# Altium PCB YW_001.PcbDoc
Units mm, origin at the board's own origin, x right, y up, seen from the top; angles counter-clockwise.
Board outline 72.75 x 132.75 mm, 2 copper layers (Top Layer, Bottom Layer); 86 components, 84 nets, 274 pads, 37 vias.
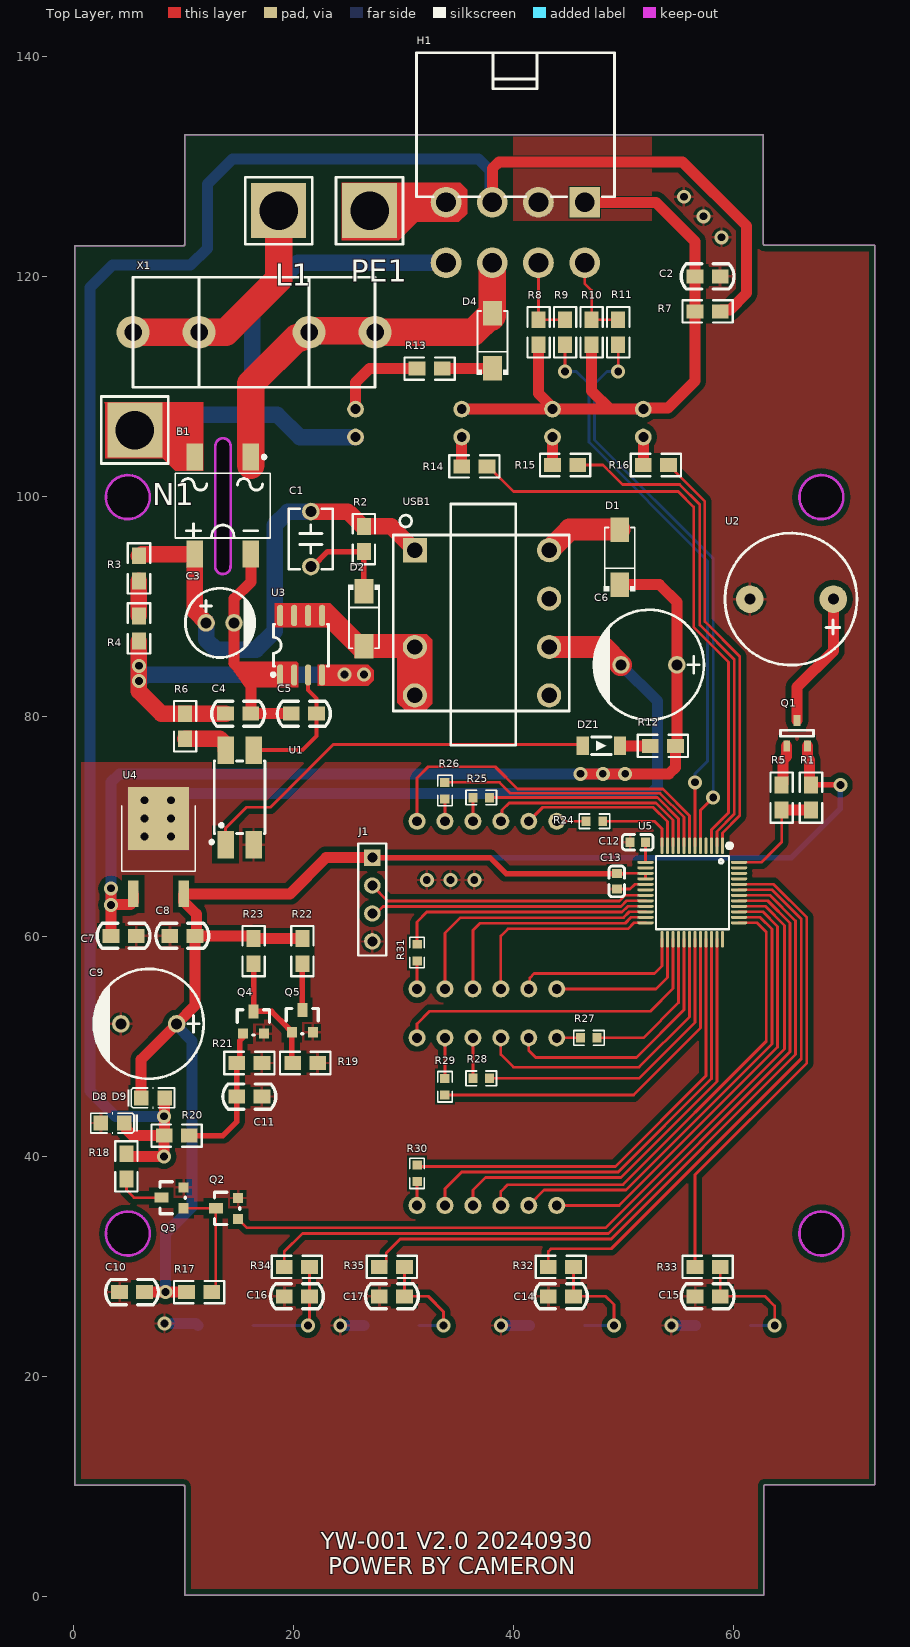
[diagram p0: Top Layer view]
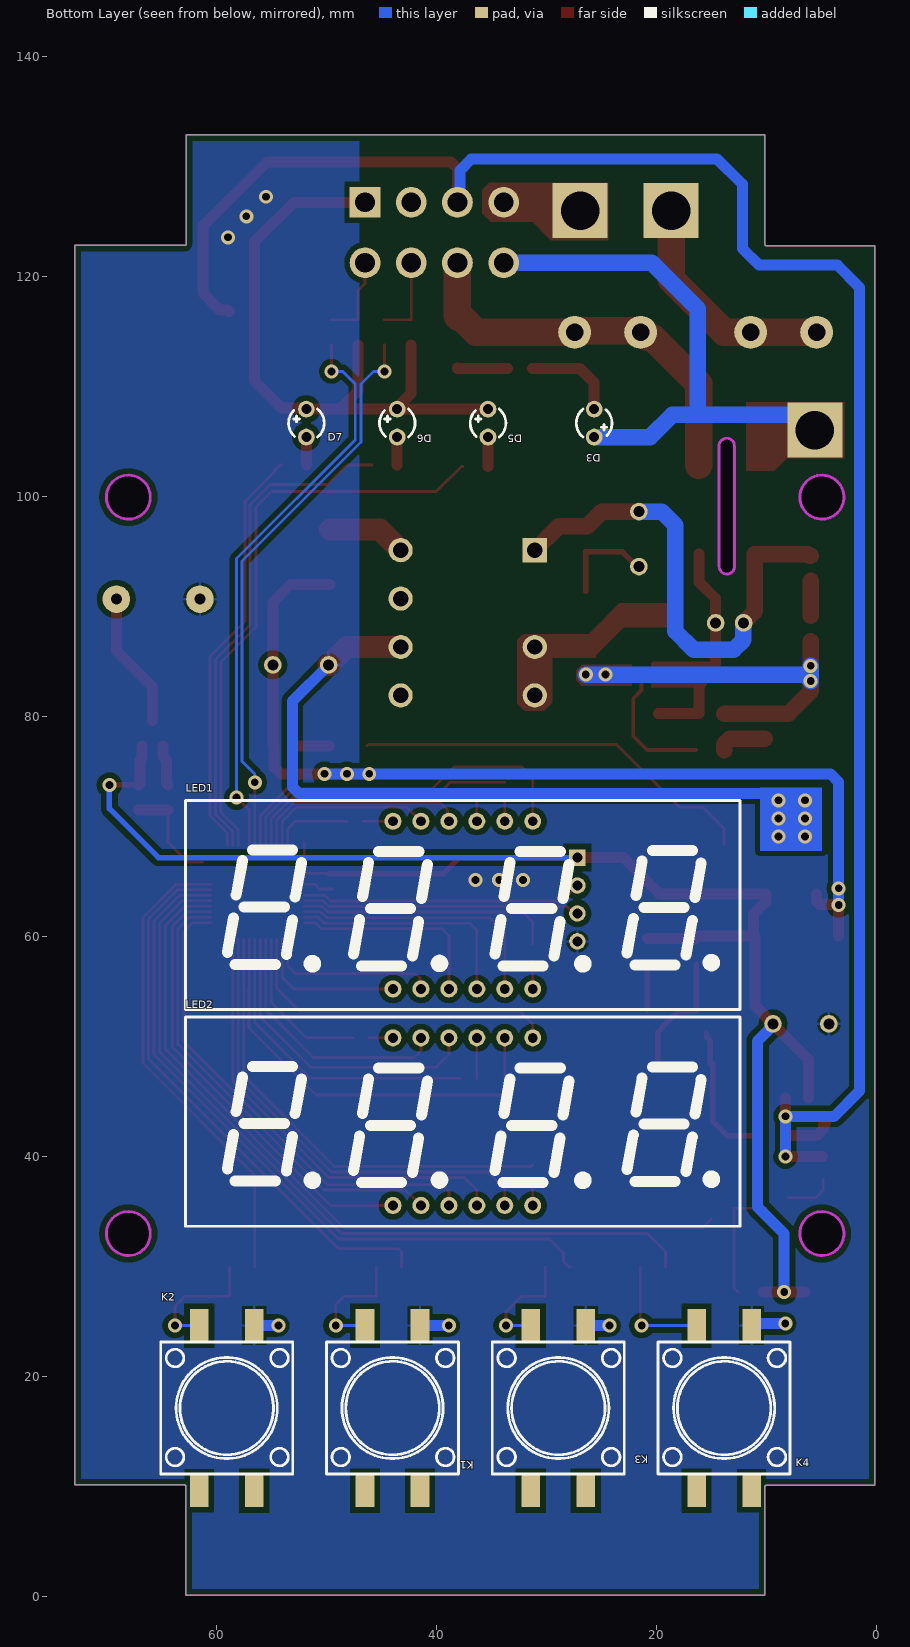
[diagram p1: Bottom Layer view, seen from below]

## Layer stack, top to bottom
Top Solder: solder mask 0.0102, Solder Resist, Dk 3.5
Top Layer: signal copper 0.0356
Dielectric 1: dielectric 0.32, FR-4, Dk 4.8
Bottom Layer: signal copper 0.0356
Bottom Solder: solder mask 0.0102, Solder Resist, Dk 3.5

## Board outline
0.127,10.127 10,10.127 cw(c10,10) 10.127,10 10.127,0.127 62.771,0.127 62.771,10.036 cw(c62.898,10.036) 62.898,10.163 72.873,10.163 72.873,122.843 cw(c72.862,122.969) 72.862,122.842 62.862,122.842 cw(c62.862,122.969) 62.735,122.969 62.735,132.873 10.127,132.873 10.127,122.933 cw(c10,122.933) 10,122.806 0.127,122.806
cut-out: 12.896,93.653 ccw(c13.596,93.653) 14.296,93.669 14.303,93.668 14.303,104.627 14.305,104.6 ccw(c13.605,104.6) 12.905,104.584 12.9,104.596
cut-out: 65.995,99.949 ccw(c67.995,99.949) 67.995,97.949 ccw(c67.995,99.949) 69.995,99.949 ccw(c67.995,99.949) 67.995,101.949 ccw(c67.995,99.949)
cut-out: 4.953,97.949 cw(c4.953,99.949) 2.953,99.949 cw(c4.953,99.949) 4.953,101.949 cw(c4.953,99.949) 6.953,99.949 cw(c4.953,99.949)
cut-out: 2.953,33.007 ccw(c4.953,33.007) 4.953,31.007 ccw(c4.953,33.007) 6.953,33.007 ccw(c4.953,33.007) 4.953,35.007 ccw(c4.953,33.007)
cut-out: 65.995,33.007 ccw(c67.995,33.007) 67.995,31.007 ccw(c67.995,33.007) 69.995,33.007 ccw(c67.995,33.007) 67.995,35.007 ccw(c67.995,33.007)

## Design rules (kind name [scope] priority, off if disabled: settings)
Clearance Clearance_1 [InPolygon] p1: gap=0.5 ignorepadtopadclearanceinfootprint=TRUE
Clearance [All] p2: gap=0.1 ignorepadtopadclearanceinfootprint=TRUE except(0: Arc-Hole Track-Hole SMDPad-Hole THPad-Hole Via-Hole Fill-Hole Poly-Hole Region-Hole Text-Hole)
DiffPairsRouting DiffPair_DiffPairsRouting [InDifferentialPair ('NewDifferentialPair1')] p1: maxlimit=0.254 minlimit=0.1 mostfreqgap=0.254 toplayer_minwidth=0.1 toplayer_maxwidth=0.381 toplayer_prefwidth=0.381 bottomlayer_minwidth=0.1 bottomlayer_maxwidth=0.381 bottomlayer_prefwidth=0.381 maxuncoupledlength=12.7
DiffPairsRouting DiffPair_DiffPairsRouting_1 [InDifferentialPair ('NewDifferentialPair1')] p2: maxlimit=0.254 minlimit=0.254 mostfreqgap=0.254 toplayer_minwidth=0.381 toplayer_maxwidth=0.381 toplayer_prefwidth=0.381 bottomlayer_minwidth=0.381 bottomlayer_maxwidth=0.381 bottomlayer_prefwidth=0.381 maxuncoupledlength=12.7
DiffPairsRouting [All] p3: maxlimit=0.254 minlimit=0.254 mostfreqgap=0.254 toplayer_minwidth=0.381 toplayer_maxwidth=0.381 toplayer_prefwidth=0.381 bottomlayer_minwidth=0.381 bottomlayer_maxwidth=0.381 bottomlayer_prefwidth=0.381 maxuncoupledlength=12.7
MatchedLengths DiffPair_MatchedLengths [InDifferentialPair ('NewDifferentialPair1')] p1: tolerance=25.4 checknetsindiffpair=FALSE checkdiffpairvsdiffpair=TRUE checkxsignals=TRUE checkothers=TRUE
MatchedLengths DiffPair_MatchedLengths_1 [InDifferentialPair ('NewDifferentialPair1')] p2: tolerance=25.4 checknetsindiffpair=FALSE checkdiffpairvsdiffpair=TRUE checkxsignals=TRUE checkothers=TRUE
PolygonConnect [All] p1: connectstyle=Relief reliefconductorwidth=0.254 reliefentries=4 polygonreliefangle="90 Angle" airgapwidth=0.254
RoutingVias [All] p1: holewidth=0.711 width=1.27 viastyle="Through Hole" minholewidth=0.711 minwidth=1.27 maxholewidth=0.711 maxwidth=1.27
SolderMaskExpansion [All] p1: expansion=0.102 istentingtop=FALSE
Width [All] p1: maxlimit=4 minlimit=0.254 preferedwidth=0.254 minimp=50.000000 maximp=50.000000 favimp=50.000000
29 further rules are at their usual default settings.

## Components (designator, comment, footprint, x,y, rotation, side; value= is the part's Value field where it differs from the comment)
B1 "DB107S" DB107S 13.589,99.187 r180 top
C1 "1uF" CAP-TH_L5.5-W4.0-P5.00-D0.5 21.59,96.139 r270 top
C2 "1uF" 0805C 58.805,120.015 r180 top
C3 "4.7uF450V" CAP-TH_BD6.3-P2.50-D1.0-FD 13.335,88.519 r0 top
C4 "1uF" 0805C 13.839,80.264 r0 top
C5 "1uF" 0805C 22.102,80.264 r180 top
C6 "1000uF25V" CAP-TH_BD10.0-P5.00-D1.0-FD 52.324,84.709 r180 top
C7 "1uF" 0805C 5.719,60.071 r180 top
C8 "1uF" 0805C 11.053,60.071 r180 top
C9 "1000uF25V" CAP-TH_BD10.0-P5.00-D1.0-FD 6.858,52.07 r180 top
C10 "100nF" 0805C 6.481,27.686 r180 top
C11 "100nF" 0805C 14.855,45.466 r0 top
C12 "100nF" C0603 51.308,68.58 r0 top value=0.1uF
C13 "100nF" C0603 49.403,65.024 r90 top value=0.1uF
C14 "104P" 0805C 45.47,27.305 r180 top value=0.1uF
C15 "104P" 0805C 58.805,27.305 r180 top value=0.1uF
C16 "104P" 0805C 21.467,27.305 r180 top value=0.1uF
C17 "104P" 0805C 30.103,27.305 r180 top value=0.1uF
D1 "RS2M" SMA-SMD_L4.4-W2.7-LS5.4-RD 49.657,94.488 r90 top
D2 "RS2M" SMA-SMD_L4.4-W2.7-LS5.4-RD 26.416,88.9 r270 top
D3 "HLMP-1503-D0000" LED-TH_BD3.0-P2.54-RD 25.654,106.68 r270 bottom
D4 "RS2M" SMA-SMD_L4.4-W2.7-LS5.4-RD 38.1,114.173 r90 top
D5 "HLMP-1503-D0000" LED-TH_BD3.0-P2.54-RD 35.306,106.68 r90 bottom
D6 "HLMP-1503-D0000" LED-TH_BD3.0-P2.54-RD 43.561,106.68 r90 bottom
D7 "HLMP-1503-D0000" LED-TH_BD3.0-P2.54-RD 51.816,106.68 r90 bottom
D8 "CD4148WSP" D0805-RD 3.556,43.053 r180 top
D9 "CD4148WSP" D0805-RD 7.239,45.339 r0 top
DZ1 "ZMM24" LL-34_L3.5-W1.5-RD 48.006,77.343 r180 top
H1 "HC-5557-2*4AW" CONN-TH_8P-P4.20_5557-2X4AW 40.182,123.996 r180 top
J1 "CON4" HDR1X4 27.178,67.183 r270 top
K1 "TS1212TPFS 250gf 072" KEY-SMD_4P-L12.0-W12.0-P5.00-LS15.0 43.984,17.145 r90 bottom
K2 "TS1212TPFS 250gf 072" KEY-SMD_4P-L12.0-W12.0-P5.00-LS15.0 59.055,17.145 r90 bottom
K3 "TS1212TPFS 250gf 072" KEY-SMD_4P-L12.0-W12.0-P5.00-LS15.0 13.843,17.145 r90 bottom
K4 "TS1212TPFS 250gf 072" KEY-SMD_4P-L12.0-W12.0-P5.00-LS15.0 28.914,17.145 r90 bottom
L1 "PZ254V-11-01P" HDR-TH_1P-P5 19.05,123.952 r0 top
LED1 "FJ5461BH 橙红" LED-SEG-TH_FJ5461AH 37.592,62.865 r180 bottom locked
LED2 "FJ5461BH 橙红" LED-SEG-TH_FJ5461AH 37.592,43.18 r180 bottom locked
N1 "PZ254V-11-01P" HDR-TH_1P-P5 5.969,104.013 r0 top
PE1 "PZ254V-11-01P" HDR-TH_1P-P5 27.305,123.952 r0 top
Q1 "8550" SOT-23 65.786,78.486 r0 top
Q2 "SW8050" "SOT-23 - S8550" 14.986,34.341 r90 top
Q3 "SW8050" "SOT-23 - S8550" 10.033,35.306 r90 top
Q4 "SW8050" "SOT-23 - S8550" 15.418,51.181 r0 top
Q5 "SW8050" "SOT-23 - S8550" 19.863,51.308 r0 top
R1 "10k" 0805 67.056,73.787 r270 top
R2 "100k" 0805 26.416,97.282 r270 top value=100K
R3 "1M" 0805 5.969,92.329 r90 top
R4 "1M" 0805 5.969,86.868 r90 top
R5 "10k" 0805 64.389,73.787 r270 top
R6 "4.7k" 0805 10.16,77.978 r90 top
R7 "10k" 0805 58.801,116.84 r180 top
R8 "47k" 0805 42.291,116.078 r270 top
R9 "100" 0805 44.704,113.792 r90 top
R10 "47k" 0805 47.117,116.078 r270 top
R11 "100" 0805 49.53,113.792 r90 top
R12 "10k" 0805 54.737,77.343 r180 top
R13 "240k" 0805 33.528,111.633 r180 top
R14 "47k" 0805 35.306,102.743 r0 top
R15 "47k" 0805 43.561,102.87 r0 top
R16 "47k" 0805 51.816,102.87 r0 top
R17 "2.2k" 0805 12.573,27.686 r180 top
R18 "470" 0805 4.826,37.973 r90 top
R19 "10k" 0805 22.225,48.514 r180 top
R20 "20k" 0805 10.541,41.91 r180 top
R21 "10k" 0805 17.145,48.514 r180 top
R22 "4.7k" 0805 20.828,57.531 r90 top
R23 "4.7k" 0805 16.383,57.531 r90 top
R24 "10R" R0603 47.371,70.485 r180 top
R25 "10R" R0603 37.084,72.644 r180 top
R26 "10R" R0603 33.782,73.27 r270 top
R27 "10R" R0603 46.863,50.8 r180 top
R28 "10R" R0603 37.084,47.117 r180 top
R29 "10R" R0603 33.782,46.355 r90 top
R30 "10R" R0603 31.242,38.481 r90 top
R31 "10R" R0603 31.242,58.547 r90 top
R32 "2.2k" 0805 45.466,29.972 r180 top
R33 "2.2k" 0805 58.801,29.972 r180 top
R34 "2.2k" 0805 21.463,29.972 r180 top
R35 "2.2k" 0805 30.099,29.972 r180 top
U1 "EL817S1(C)(TU)-F" OPTO-SMD-4_L4.6-W6.5-P2.54-LS10.3-TL 15.113,72.662 r90 top
U2 "BUZZER" BUZZ-7.6/12 65.288,90.678 r180 top
U3 "VIPER12ASTR-E" SOIC-8_L5.0-W4.0-P1.27-LS6.0-BL 20.701,86.487 r0 top
U4 "MC7805CDTRKG" TO-252-2_L6.6-W6.1-P4.58-LS9.9-TL 7.747,67.315 r90 top
U5 "STC8H8K64U-45I-LQFP48" LQFP-48_L7.0-W7.0-P0.50-LS9.0-BL 56.261,64.008 r180 top
USB1 "ECO2017SEO-X16V015" XFMR-TH_ECO2017SEO-X16V015 32.512,95.123 r0 top
X1 "392 T10A 250V" FUSE 5.43,114.935 r0 top

## Footprints (in the part's own frame and the unit in brackets; to place one, negate y for a bottom-side part, rotate by r counter-clockwise, add the part's x,y. Pads: shape width x height; smd on the part's side, far side on the other; paste and mask are expansions set on the pad)
0805 [mil]
  rect 60x50 smd: 1(0,0) 2(90,0)
  silkscreen extent -45,-40 135,40
0805C [mil]
  rect 60x50 smd: 1(0.16,0) 2(90.16,0)
  silkscreen extent -49,-45 140,45
BUZZ-7.6/12 [mm]
  round 2.5 hole 1: 1(-3.8,0) 2(3.8,0)
  silkscreen extent -5.95,-6 6.05,6
C0603 [mm]
  rect 0.8x0.9 smd: 1(-0.7,0) 2(0.7,0)
  silkscreen extent -1.41,-0.71 1.39,0.72
CAP-TH_BD6.3-P2.50-D1.0-FD [mm]
  round 1.6 hole 1: 1(-1.27,0) 2(1.27,0)
  silkscreen extent -3.15,-3.15 3.17,3.15
CAP-TH_BD10.0-P5.00-D1.0-FD [mm]
  round 1.6 hole 1: 1(-2.54,0) 2(2.54,0)
  silkscreen extent -5,-5 5.08,5
CAP-TH_L5.5-W4.0-P5.00-D0.5 [mm]
  round 1.6 hole 1: 1(-2.5,0) 2(2.5,0)
  silkscreen extent -2.75,-2 2.75,2
CONN-TH_8P-P4.20_5557-2X4AW [mm]
  rect 2.8x2.8 hole 1.8: 1(-6.3,-2.75)
  round 2.8 hole 1.8: 2(-6.3,2.75) 3(-2.1,-2.75) 5(2.1,-2.75) 7(6.3,-2.75)
  round 2.8 hole 1.8 copper offset 0,0: 4(-2.1,2.75) 6(2.1,2.75) 8(6.3,2.75)
  silkscreen extent -9,-16.35 9,-3.25
D0805-RD [mm]
  rect 1.335x1.35 smd paste-100 mask+0.051: 1(-1.067,0) 2(1.067,0)
  silkscreen extent -2.29,-0.94 1.96,0.94
DB107S [mm]
  rect 1.505x2.47 smd: 1(-2.55,-4.41) 2(2.55,-4.41) 3(2.55,4.41) 4(-2.55,4.41)
  silkscreen extent -4.33,-4.56 4.33,2.95
FUSE [mm]
  round 3 hole 1.6: 1(0,0) 1(6,0) 2(16,0) 2(22,0)
  silkscreen extent 0,-5 22,5
HDR1X4 [mm] "Connector; Header; 4 Position"
  rect 1.5x1.5 hole 0.9: 1(0,0)
  round 1.5 hole 0.9: 2(2.54,0) 3(5.08,0) 4(7.62,0)
  silkscreen extent -1.27,-1.27 8.89,1.27
HDR-TH_1P-P5 [mm]
  rect 5x5 hole 3.5: 1(-0.381,2.032)
  silkscreen extent -3.43,-1.02 2.67,5.08
KEY-SMD_4P-L12.0-W12.0-P5.00-LS15.0 [mm]
  rect 3x1.7 smd: 1(-7.499,2.5) 2(7.499,2.5) 3(-7.499,-2.5) 4(7.499,-2.5)
  silkscreen extent -6,-6 6,6
LED-SEG-TH_FJ5461AH [mm]
  round 1.55 hole 0.9: 1(-6.35,-7.62) 2(-3.81,-7.62) 3(-1.27,-7.62) 4(1.27,-7.62) 5(3.81,-7.62) 6(6.35,-7.62) 7(6.35,7.62) 8(3.81,7.62) 9(1.27,7.62) 10(-1.27,7.62) 11(-3.81,7.62) 12(-6.35,7.62)
  silkscreen extent -25.2,-9.5 25.2,9.5
LED-TH_BD3.0-P2.54-RD [mil]
  round 60 hole 35.43: 1(-50,0) 2(50,0)
  silkscreen extent -50,-64 50,64
LL-34_L3.5-W1.5-RD [mm]
  rect 1.1x1.7 smd: 1(-1.7,0) 2(1.7,0)
  silkscreen extent -0.9,-0.8 0.9,0.8
LQFP-48_L7.0-W7.0-P0.50-LS9.0-BL [mm]
  oval 0.27x1.5 smd paste+0 mask+0.05: 1(-2.75,-4.25) 2(-2.25,-4.25) 3(-1.75,-4.25) 4(-1.25,-4.25) 5(-0.75,-4.25) 6(-0.25,-4.25) 7(0.25,-4.25) 8(0.75,-4.25) 9(1.25,-4.25) 10(1.75,-4.25) 11(2.25,-4.25) 12(2.75,-4.25) 25(2.75,4.25) 26(2.25,4.25) 27(1.75,4.25) 28(1.25,4.25) 29(0.75,4.25) 30(0.25,4.25) 31(-0.25,4.25) 32(-0.75,4.25) 33(-1.25,4.25) 34(-1.75,4.25) 35(-2.25,4.25) 36(-2.75,4.25)
  oval 1.5x0.27 smd paste+0 mask+0.05: 13(4.25,-2.75) 14(4.25,-2.25) 15(4.25,-1.75) 16(4.25,-1.25) 17(4.25,-0.75) 18(4.25,-0.25) 19(4.25,0.25) 20(4.25,0.75) 21(4.25,1.25) 22(4.25,1.75) 23(4.25,2.25) 24(4.25,2.75) 37(-4.25,2.75) 38(-4.25,2.25) 39(-4.25,1.75) 40(-4.25,1.25) 41(-4.25,0.75) 42(-4.25,0.25) 43(-4.25,-0.25) 44(-4.25,-0.75) 45(-4.25,-1.25) 46(-4.25,-1.75) 47(-4.25,-2.25) 48(-4.25,-2.75)
  silkscreen extent -3.59,-4.46 3.3,3.34
OPTO-SMD-4_L4.6-W6.5-P2.54-LS10.3-TL [mm]
  rect 2.5x1.5 smd: 1(-4.3,1.27) 2(-4.3,-1.27) 3(4.3,-1.27) 4(4.3,1.27)
  silkscreen extent -4.21,-2.3 3.3,2.69
R0603 [mm]
  rect 0.806x0.864 smd paste-100 mask+0.051: 1(-0.753,0) 2(0.753,0)
  silkscreen extent -1.39,-0.66 1.39,0.66
SMA-SMD_L4.4-W2.7-LS5.4-RD [mm]
  rect 2.2x1.7 smd: 1(-2.5,0) 2(2.5,0)
  silkscreen extent -3.08,-1.44 2.7,1.44
SOIC-8_L5.0-W4.0-P1.27-LS6.0-BL [mil]
  oval 22.38x76.78 smd: 1(-75,-106.5) 2(-25,-106.5) 3(25,-106.5) 4(75,-106.5) 5(75,106.5) 6(25,106.5) 7(-25,106.5) 8(-75,106.5)
  silkscreen extent -106,-111 98,75
SOT-23 [mm]
  rect 0.6x1 smd: 1(-0.95,-1.15) 2(0.95,-1.15) 3(0,1.15)
  silkscreen extent -1.5,-0.27 1.5,0.27
"SOT-23 - S8550" [mil]
  rect 36x36 smd: 1(0,0) 2(75,0)
  rect 36x50 smd: 3(38,80)
  silkscreen extent -20,-5 95,85
TO-252-2_L6.6-W6.1-P4.58-LS9.9-TL [mm]
  rect 2.409x0.979 smd: 1(-3.424,2.29) 3(-3.423,-2.29)
  rect 5.711x5.548 smd: 2(3.424,0)
  silkscreen extent -1.38,-3.35 4.58,3.35
XFMR-TH_ECO2017SEO-X16V015 [mm]
  rect 2.2x2.2 hole 1.4 paste-2539.97 mask+0.05: 1(-1.46,0)
  round 2.2 hole 1.4 paste-2539.97 mask+0.05: 2(-1.46,-8.8) 3(-1.46,-13.2) 4(10.74,0) 5(10.74,-4.394) 6(10.74,-8.8) 7(10.74,-13.2)
  silkscreen extent -3.44,-17.73 12.56,4.21

## Part data
B1: library part 整流桥堆
C1 C2 C4 C5 C7 C8 C10 C11 C12 C13 C14 C15 C16 C17: library part Cap, "Capacitor", LatestRevisionDate=17-Jul-2002, LatestRevisionNote="Re-released for DXP Platform.", PackageDescription="Radial Cap, Thru-Hole; 2 Leads; 0.3 in Pin Spacing", PackageReference=RAD-0.3, Published=8-Jun-2000, Publisher="Altium Limited"
C3: library part 电解电容
C6 C9: library part 电解电容, "CD2881081EM1017VFL"
D1 D2 D4 D8 D9: library part 二极管
D3 D5 D6 D7: JLCPCB Part Class="Extended Part", Manufacturer=Broadcom/AVAGO(安华高), Add into BOM=yes, Convert to PCB=yes, Datasheet=https://atta.szlcsc.com/upload/public/pdf/source/20230602/8B2B82820B3183ED281EA59E7A8BD22E.pdf, Device=HLMP-1503-D0000, LCSC Part Name=HLMP-1503-D0000, Manufacturer Part=HLMP-1503-D0000, Supplier=LCSC, Supplier Footprint=插件, Supplier Part=C6795839, Symbol=HLMP-1503-D0000
DZ1: library part ZMM24_C7470923, JLCPCB Part Class="Extended Part", Manufacturer="HXY MOSFET(华轩阳电子)", Power Dissipation=500mW, Reverse Leakage Current (Ir)=100nA@18V, Zener Voltage (Nom)=24V, Zener Voltage (Range)=22.8V~25.6V, Add into BOM=yes, Convert to PCB=yes, Datasheet=https://atta.szlcsc.com/upload/public/pdf/source/20230915/581C4D7CC1FE908B5D3501977E79B43B.pdf, Device=ZMM24_C7470923, Diode Configuration=独立式, LCSC Part Name=ZMM24, Manufacturer Part=ZMM24, Supplier=LCSC, Supplier Footprint=LL-34, Supplier Part=C7470923, Symbol=ZMM24_C7470923, Zener Impedance (Zzt)=80Ω
H1: Current Rating (Max)=9A, JLCPCB Part Class="Extended Part", LCSC Part Name="2x4P 间距:4.2mm 弯插", Manufacturer=HCTL(华灿天禄), Operating Temperature Range=-25℃~+85℃, Add into BOM=yes, Contact Material=黄铜, Contact Plating=锡, Convert to PCB=yes, Datasheet=https://atta.szlcsc.com/upload/public/pdf/source/20230620/3AA4118B2C2E81189EA8FE45B17A7E9B.pdf, Device=HC-5557-2*4AW, Manufacturer Part=HC-5557-2*4AW, Mounting Style=弯插, Number of Pins=8P, Number of PINs Per Row=4, Number of Rows=2, Pins Structure=2x4P, Pitch=4.2mm, Reference Series=-, Row Spacing=4.2mm, Supplier=LCSC, Supplier Footprint=弯插,P=4.2mm, Supplier Part=C2845789, Symbol=HC-5557-2*4AW
J1: "Connector"
K1 K2 K3 K4: Actuator/Cap Color=黑色, Contact Current=50mA, Insulation Resistance=100MΩ, JLCPCB Part Class="Extended Part", LCSC Part Name="12*12*1.2mm 立贴 轻触开关", Manufacturer="SHOU HAN(首韩)", Operating Force=2.5N, Operating Temperature=-20℃~+80℃, Voltage Rating (DC)=12V, Actuator Style=圆形按钮, Add into BOM=yes, Circuit=单刀单掷, Convert to PCB=yes, Datasheet=https://atta.szlcsc.com/upload/public/pdf/source/20240530/61FBD9981DC96E206A7130E740881932.pdf, Device="TS1212TPFS 250gf 072", Manufacturer Part="TS1212TPFS 250gf 072", Mechanical Life=10万次, Mounting Style=立贴, Pin Style=鸥翼型, Strike Gundam=不带, Supplier=LCSC, Supplier Footprint=SMD-4P,12x12mm, Supplier Part=C2858285, Switch Height=1.2mm, Switch Length=12mm, Switch Width=12mm, Symbol="TS1212TPFS 250GF 072"
L1 N1 PE1: Color=黑色, Current Rating (Max)=-, JLCPCB Part Class="Extended Part", LCSC Part Name="间距:2.54mm 1x1P 直插 方针", Manufacturer=XFCN(兴飞), Operating Temperature Range=-40℃~+105℃, Add into BOM=yes, Circluar Pins/Square Pins=方针, Contact Material=黄铜, Contact Plating=-, Convert to PCB=yes, Datasheet=https://atta.szlcsc.com/upload/public/pdf/source/20200309/C492400_46876A5B545F5AE6B8D4A09C46E276E8.pdf, Device=PZ254V-11-01P, Insulation Height=2.5mm, Length of End Connection Pin=3mm, Length of Mating Pin=6mm, Manufacturer Part=PZ254V-11-01P, Mounting Type=直插, Number of Pins=1P, Number of Rows=单排, Pin Structure=1x1P, Pitch=2.54mm, Row Spacing=-, Supplier=LCSC, Supplier Footprint=插件,P=2.54mm, Supplier Part=C492400, Symbol=PZ254V-11-01P, Voltage Rating (Max)=-
LED1 LED2: JLCPCB Part Class="Extended Part", LCSC Part Name="4位0.56英寸红色数码管 共阳极", Luminous Color=红色, Manufacturer=志浩, Add into BOM=yes, Convert to PCB=yes, Datasheet=https://atta.szlcsc.com/upload/public/pdf/source/20121231/1457706574845.pdf, Device="FJ5461BH 橙红", Digit/Alpha Size(inch)=0.56, LED Polarity=共阳极, Manufacturer Part="FJ5461BH 橙红", Number of Characters=4位, Supplier=LCSC, Supplier Footprint=插件, Supplier Part=C10713, Symbol=FJ5461BH-red-orange
Q1: library part PNP
Q2 Q3 Q4 Q5: library part 普通三级管（NPN）
R1 R5 R24 R25 R26 R27 R28 R29 R30 R31 R32 R33 R34 R35: library part RES2
R2 R3 R4 R6 R7 R8 R9 R10 R11 R12 R13 R14 R15 R16 R17 R18 R19 R20 R21 R22 R23: library part Res2, "Resistor", LatestRevisionDate=17-Jul-2002, LatestRevisionNote="Re-released for DXP Platform.", PackageDescription="Axial Device, Thru-Hole; 2 Leads; 0.4 in Pin Spacing", PackageReference=AXIAL-0.4, Published=8-Jun-2000, Publisher="Altium Limited"
U1: Collector-Emitter Saturation Voltage (Vce(sat)@Ic,IF)=100mV@1mA,20mA, Forward Voltage=1.2V, Input voltage type=DC, Isolation Voltage(rms)=5kV, JLCPCB Part Class="Basic Part", LCSC Part Name="DC输入 隔离电压(rms):5000V", Load Voltage=35V, Manufacturer=EVERLIGHT(亿光), Operating Temperature=-55℃~+110℃, Output Current=50mA, Reverse Voltage=6V, Add into BOM=yes, Convert to PCB=yes, Datasheet=https://atta.szlcsc.com/upload/public/pdf/source/20181026/C323798_FBCE14484708FE0807B9A090D624C4F0.pdf, Device=EL817S1(C)(TU)-F, Fall time=18us@2mA,100Ω, Manufacturer Part=EL817S1(C)(TU)-F, Number of Outputs=1, Output Type=光电三极管, Rise time=18us@2mA,100Ω, Supplier=LCSC, Supplier Footprint=SMD-4P, Supplier Part=C106900, Symbol=EL817S1(C)(TU)-F
U2: "Buzzer"
U3: Breakdown Voltage=730V, JLCPCB Part Class="Extended Part", LCSC Part Name=低功耗离线开关模式电源主开关, Manufacturer=ST(意法半导体), Operating Temperature=-40℃~+150℃, Supply Voltage=9V~38V, Switching Frequency=60kHz, Add into BOM=yes, Convert to PCB=yes, Datasheet=https://atta.szlcsc.com/upload/public/pdf/source/20140724/1457707166995.pdf, Device=VIPER12ASTR-E, Manufacturer Part=VIPER12ASTR-E, Output Isolation=非隔离, Supplier=LCSC, Supplier Footprint=SOIC-8, Supplier Part=C7522, Symbol=VIPER12ASTR-E
U4: Dropout Voltage=2V@(1A), JLCPCB Part Class="Extended Part", Manufacturer=onsemi(安森美), MAX Output Current=1A, Maximum Input Voltage=35V, Operating Temperature=0℃~+125℃, Output Voltage=5V, Power Supply Rejection Ratio (PSRR)=83dB@(120Hz), standby current=6.5mA, Add into BOM=yes, Convert to PCB=yes, Datasheet=https://atta.szlcsc.com/upload/public/pdf/source/20181108/C327508_B78150FF97C8C38061229236786A5884.pdf, Device=MC7805CDTRKG, LCSC Part Name=MC7805CDTRKG, Manufacturer Part=MC7805CDTRKG, Number of Outputs=1, Output Polarity=正极, Output Type=固定, Supplier=LCSC, Supplier Footprint=TO-252-2(DPAK), Supplier Part=C54285, Symbol=MC7805CDTRKG
U5: JLCPCB Part Class="Extended Part", LCSC Part Name="宽电压/高速/高可靠/低功耗/强抗静电/较强抗干扰的新一代 8051 单片机", Low-Voltage Detect=-, Manufacturer=STC(宏晶), ADC (Bit)=-, Add into BOM=yes, CCP Capture/Compare=-, communication protocol=-, Convert to PCB=yes, CPU Core=51系列, CPU Maximum Speed=-, DAC (Bit)=-, Datasheet=https://atta.szlcsc.com/upload/public/pdf/source/20230914/FE7F6A67FEB4E2D9A560A799C5B97078.pdf, Device=STC8H8K64U-45I-LQFP48, Direct Memory Access=-, GPIO Ports Number=-, Infrared Data Association=-, Internal Comparator=-, Internal Oscillator=-, Manufacturer Part=STC8H8K64U-45I-LQFP48, Operating Voltage Range=-, Program Memory Type=FLASH, Program Storage Size=64KB, PWM (Bit)=-, Real-Time Clock=-, Secure Digital Input and Output=-, Supplier=LCSC, Supplier Footprint=LQFP-48(7x7), Supplier Part=C3013145, Symbol=STC8H8K64U-45I-LQFP48, Universal Serial Bus=-, Watchdog=-
USB1: Isolation Voltage=-, JLCPCB Part Class="Extended Part", Manufacturer=TDK, Add into BOM=yes, Convert to PCB=yes, Datasheet=https://atta.szlcsc.com/upload/public/pdf/source/20210330/C2762803_0539F2D7383AC707985FED84B39ED265.pdf, Device=ECO2017SEO-X16V015, LCSC Part Name=ECO2017SEO-X16V015, Manufacturer Part=ECO2017SEO-X16V015, Output Current=-, Power=-, Primary Side Voltage=-, Primary Winding=三路, Secondary Side Voltage=-, Secondary Winding=两路, Supplier=LCSC, Supplier Footprint=插件, Supplier Part=C2762803, Symbol=ECO2017SEO-X16V015
X1: library part 保险丝

## Via types
v1: diameter 1.27, hole 0.711, Top Layer to Bottom Layer, 37 vias

## Nets (pads, with @x,y where several pads share a name; then routed paths per layer and width w, separated by ;. In a path a pad name is that pad's centre, name@x,y a point inside that pad or via, vN(x,y) a via of type N, cw(c..) or ccw(c..) an arc to the next point about the centre after c; other vN are vias at no path point)
1A: LED1.11 U5.11 | length 15.9
  Top Layer w0.254: LED1.11 42.672,71.755 52.705,71.755 54.011,70.449 U5.11
1b: LED1.7 U5.7 | length 33.8
  Top Layer w0.254: LED1.7 31.369,70.612 31.242,70.739 31.242,74.422 32.258,75.438 38.354,75.438 40.386,73.406 53.594,73.406 56.011,70.989 U5.7
1C: LED1.4 U5.23 | length 21.5
  Top Layer w0.254: LED1.4 36.322,60.579 36.957,61.214 50.165,61.214 50.709,61.758 U5.23
1D: LED1.2 U5.25 | length 15.9
  Top Layer w0.254: LED1.2 41.497,55.34 41.497,56.252 41.887,56.642 52.832,56.642 53.511,57.321 U5.25
1DIG1: R24.1 U5.12 | length 7.2
  Top Layer w0.254: R24.1 52.832,70.485 53.511,69.806 U5.12
1DIG2: R25.1 U5.9 | length 20.4
  Top Layer w0.254: R25.1@37.827,72.644 53.086,72.644 55.011,70.719 U5.9
1DIG3: R26.1 U5.8 | length 25.6
  Top Layer w0.254: R26.1 38.752,74.024 39.751,73.025 53.34,73.025 55.508,70.857 55.508,68.261 U5.8
1DIG4: R31.2 U5.21 | length 23.4
  Top Layer w0.254: R31.2 31.242,61.341 32.131,62.23 49.878,62.23 50.406,62.758 U5.21
1DP: LED1.3 U5.24 | length 18.5
  Top Layer w0.254: LED1.3 38.862,60.071 39.497,60.706 50.419,60.706 50.971,61.258 U5.24
1E: LED1.1 U5.26 | length 14
  Top Layer w0.254: LED1.1 52.959,55.245 54.011,56.297 U5.26
1F: LED1.10 U5.10 | length 19.8
  Top Layer w0.254: LED1.10 38.98,70.603 38.98,71.492 39.624,72.136 52.959,72.136 54.511,70.584 U5.10
1G: LED1.5 U5.22 | length 24.1
  Top Layer w0.254: LED1.5 33.782,60.325 35.179,61.722 49.999,61.722 50.535,62.258 U5.22
2A: LED2.11 U5.29 | length 23.7
  Top Layer w0.254: LED2.11 41.402,49.657 42.037,49.022 51.181,49.022 55.511,53.352 U5.29
2b: LED2.7 U5.27 | length 30.4
  Top Layer w0.254: LED2.7 31.242,52.07 32.385,53.213 52.451,53.213 54.511,55.273 U5.27
2C: LED2.4 U5.35 | length 40.6
  Top Layer w0.254: LED2.4 36.322,36.957 37.465,38.1 49.784,38.1 58.511,46.827 U5.35
2D: LED2.2 U5.38 | length 42.1
  Top Layer w0.254: LED2.2 42.799,36.957 50.231,36.957 63.5,50.226 63.5,60.682 62.424,61.758 U5.38
2DIG1: R27.1 U5.28 | length 14.5
  Top Layer w0.254: R27.1 51.816,50.8 55.011,53.995 U5.28
2DIG2: R28.1 U5.31 | length 28.3
  Top Layer w0.254: R28.1 51.435,47.117 56.511,52.193 U5.31
2DIG3: R29.1 U5.32 | length 33.8
  Top Layer w0.254: R29.1 50.936,45.602 57.023,51.689 57.023,55.408 57.011,55.42 U5.32
2DIG4: R30.2 U5.33 | length 42.1
  Top Layer w0.254: R30.2 31.36,39.116 49.276,39.116 57.511,47.351 U5.33
2DP: LED2.3 U5.37 | length 43.8
  Top Layer w0.254: LED2.3 38.862,36.83 39.485,37.453 49.956,37.453 62.992,50.489 62.992,60.428 62.162,61.258 U5.37
2E: LED2.1 U5.39 | length 41.1
  Top Layer w0.254: LED2.1 49.618,35.56 64.008,49.95 64.008,60.928 62.678,62.258 U5.39
2F: LED2.10 U5.30 | length 28.1
  Top Layer w0.254: LED2.10 38.862,49.276 40.005,48.133 51.435,48.133 56.011,52.709 U5.30
2G: LED2.5 U5.34 | length 42.6
  Top Layer w0.254: LED2.5 33.782,37.084 35.306,38.608 49.53,38.608 58.011,47.089 U5.34
5V: C8.1 C9.1 C10.1 C13.2 D9.1 J1.1 Q1.2 R1.1 R17.2 R22.2 R23.2 U4.3 U5.15 U5.16 | length 158.5
  Top Layer w0.254: C13.2 49.437,65.758 U5.15 ; U5.16 U5.15@52.011,65.742
  Top Layer w0.5: J1.1 37.877,67.183 39.335,65.724 C13.2 C13.2@49.784,65.724 ; R1.1 v1(69.723,73.787)
  Top Layer w1: D9.1 6.172,48.844 C9.1 11.049,53.721 C8.1 ; C10.1 v1(8.382,27.686) R17.2 ; R22.2 R23.2 16.383,59.936 16.248,60.071 C8.1 ; J1.1 24.82,67.183 24.816,67.187 22.991,67.187 19.696,63.892 U4.3 10.037,63.198 11.176,62.059 11.176,60.198 C8.1 ; Q1.2 66.736,76.234 66.921,76.049 66.921,73.922 R1.1
  Bottom Layer w0.5: J1.1 65.278,67.183 69.723,71.628 v1(69.723,73.787)
  Bottom Layer w1: v1(8.382,27.686) 8.382,33.02 10.795,35.433 10.795,50.511 9.398,51.908 C9.1
11V+: C6.1 C7.2 D1.1 R12.1 U4.1 | length 95
  Top Layer w1: C7.2 v1(3.429,62.865) ; v1(3.429,64.389) v1(3.429,62.865) ; U4.1 5.457,63.198 5.176,62.917 3.481,62.917 v1(3.429,62.865) ; v1(46.101,74.803) v1(48.133,74.803) v1(50.165,74.803) 54.151,74.803 54.737,75.389 R12.1 54.864,77.47 C6.1 54.864,90.424 53.3,91.988 D1.1
  Bottom Layer w1: v1@3.429,63.119 3.429,74.041 4.191,74.803 v1(48.133,74.803) v1(50.165,74.803)
BEEP: R1.2 R5.2 U5.48 | length 9.5
  Top Layer w0.254: U5.48@61.253,66.758 62.567,66.758 64.389,68.58 R5.2
  Top Layer w1: R5.2 R1.2
D1: R16.2 U5.1 | length 38
  Top Layer w0.254: R16.2 54.229,102.87 54.737,102.362 54.737,102.235 57.404,99.568 57.404,88.646 60.579,85.471 60.579,70.993 59.011,69.425 U5.1
D2: R15.2 U5.2 | length 45.5
  Top Layer w0.254: R15.2 48.133,102.87 49.911,101.092 55.118,101.092 56.95,99.26 56.95,88.338 60.071,85.217 60.071,71.127 58.511,69.567 U5.2
D3: R14.2 U5.3 | length 53.1
  Top Layer w0.254: R14.2 37.719,102.743 40.005,100.457 54.991,100.457 56.388,99.06 56.388,88.138 59.563,84.963 59.563,71.261 58.011,69.709 U5.3
D4: D3.1 R13.2 | length 9.1
  Top Layer w0.254: R13.2@30.861,112.014 R13.2
  Top Layer w1: D3.1 25.654,110.363 26.924,111.633 R13.2
FB: C5.1 U1.3 U3.3 | length 12.1
  Top Layer w0.354: U1.3 20.828,76.962 22.098,78.232 C5.1 22.098,81.661 21.336,82.423 U3.3
GND: C2.1 C6.2 C7.1 C8.2 C9.2 C10.2 C11.2 C12.1 C13.1 C14.2 C15.2 C16.2 C17.2 D8.2 H1.3 J1.4 K1.4 K2.4 K3.4 K4.4 Q2.2 Q3.2 Q4.2 Q5.2 R19.1 R21.1 U1.2 U2.2 U4.2 U5.17 USB1.6 | length 82.5
  Top Layer w0.254: C13.1 50.608,64.324 51.042,64.758 U5.17
  Top Layer w2: USB1.6 48.145,86.323 49.759,84.709 C6.2
  Bottom Layer w1: 7.747,68.326 7.747,69.088 7.747,70.739 7.747,72.39 7.82,72.39 8.455,73.025 52.5,73.025 53.086,73.611 53.086,81.407 C6.2 ; v1(8.283,24.838) 11.149,24.838 K3.4 ; v1(24.263,24.644) K4.4 ; v1(38.868,24.644) K1.4 ; v1(54.362,24.644) K2.4
  other v1: 32.131,65.151 34.29,65.151 36.449,65.151 6.477,69.088 8.89,69.088 6.477,70.739 8.89,70.739 6.477,72.39 8.89,72.39 58.928,123.571 57.277,125.476 55.499,127.254
K1: R33.2 U5.44 | length 43.4
  Top Layer w0.254: R33.2 56.515,38.354 66.675,48.514 66.675,61.722 63.639,64.758 U5.44
K2: R32.2 U5.43 | length 51.1
  Top Layer w0.254: R32.2 43.18,31.369 43.434,31.623 48.895,31.623 66.167,48.895 66.167,61.608 63.517,64.258 U5.43
K3: R35.2 U5.42 | length 64.6
  Top Layer w0.254: R35.2 27.94,29.972 28.448,30.48 28.448,31.242 29.718,32.512 48.895,32.512 65.659,49.276 65.659,61.435 63.336,63.758 U5.42
K4: R34.2 U5.41 | length 72.1
  Top Layer w0.254: R34.2 19.177,31.369 20.828,33.02 48.641,33.02 65.151,49.53 65.151,61.234 63.127,63.258 U5.41
LIN: B1.1 D4.2 H1.6 X1.2 | length 36.7
  Top Layer w2.5: B1.1@16.139,102.87 B1.1 16.139,110.246 20.328,114.435 20.659,114.435 21.159,114.935 X1.2@21.43,114.935 ; X1.2@21.557,115.062 27.303,115.062 27.43,114.935 36.362,114.935 37.75,116.323 38,116.323 38.1,116.423 D4.2 38.082,116.691 H1.6
NetB1_3: B1.3 C1.1 C3.1 R2.1 R3.2 USB1.1 | length 45
  Top Layer w1.5: R3.2 6.072,94.615 6.234,94.777 B1.3 11.039,89.572 12.065,88.546 C3.1 ; C1.1 24.956,98.639 26.313,97.282 R2.1 28.892,97.282 USB1.1
  Bottom Layer w1.5: C3.1 12.084,88.5 12.084,86.966 12.963,86.087 16.618,86.087 18.288,87.757 18.288,97.409 19.499,98.62 21.571,98.62 C1.1 ; C3.1@12.065,88.546 C3.1@12.084,88.565
NetB1_4: B1.4 C3.2 C4.2 C5.2 U3.1 U3.2 | length 19.5
  Top Layer w1: B1.4 16.139,92.247 14.605,90.713 14.605,84.836 15.748,83.693 16.129,83.312 C4.2 C5.2
NetC1_2: C1.2 D2.1 R2.2 | length 9
  Top Layer w0.5: C1.2@21.59,93.599 21.717,93.599 23.114,94.996 R2.2 D2.1
NetC2_2: C2.2 D5.2 D6.2 D7.2 H1.1 R7.2 R8.2 R10.2 | length 59.5
  Top Layer w1: D5.2 D6.2 ; R8.2 42.291,109.362 43.561,108.092 D6.2 ; H1.1 52.959,126.746 56.515,123.19 C2.2 R7.2 56.515,110.49 54.075,108.05 51.916,108.05 D7.2 48.768,107.95 ; R10.2 47.117,109.601 48.768,107.95 ; 48.895,107.95 48.768,107.95 ; D6.2 48.768,107.95
NetC4_1: C4.1 R4.1 R6.2 U3.4 | length 35.3
  Top Layer w1.5: R4.1 v1(5.969,83.223) 5.969,82.296 8.013,80.252 R6.2@10.045,80.252 ; R6.2 C4.1
  Bottom Layer w1.5: v1(5.969,84.62) v1(5.969,83.223) 6.566,83.82 v1(24.638,83.82) v1(26.416,83.82)
NetC11_1: C11.1 Q4.1 R20.1 R21.2 | length 13.2
  Top Layer w0.5: R20.1 13.589,41.91 14.859,43.18 C11.1 14.859,48.387 14.986,48.387 15.121,48.522 15.121,50.522 15.418,50.819 Q4.1
NetC12_2: C12.2 U5.13 | length 1.8
  Top Layer w0.254: C12.2 52.011,68.577 U5.13
NetC14_1: C14.1 K1.2 R32.1 | length 11.2
  Top Layer w0.254: R32.1 C14.1 48.387,27.305 49.143,26.549 v1(49.143,24.644)
  Bottom Layer w0.254: K1.2 v1(49.143,24.644)
NetC15_1: C15.1 K2.2 R33.1 | length 12
  Top Layer w0.254: R33.1 C15.1 62.865,27.305 63.754,26.416 v1(63.754,24.638)
  Bottom Layer w0.254: K2.2 61.561,24.638 v1(63.754,24.638)
NetC16_1: C16.1 K3.2 R34.1 | length 10.3
  Top Layer w0.254: v1@21.463,24.638 C16.1 R34.1
  Bottom Layer w0.254: K3.2 16.349,24.638 v1(21.336,24.638)
NetC17_1: C17.1 K4.2 R35.1 | length 10.3
  Top Layer w0.254: R35.1 C17.1 32.258,27.305 33.661,25.902 v1(33.661,24.644)
  Bottom Layer w0.254: K4.2 v1(33.661,24.644)
NetD1_1: D1.2 USB1.4 | length 7.2
  Top Layer w2: USB1.4 45.117,96.988 D1.2
NetD2_1: D2.2 U3.5 U3.6 U3.7 U3.8 USB1.2 USB1.3 | length 9.4
  Top Layer w0.5: U3.8 U3.7 U3.6 U3.5 23.874,89.192 26.162,86.904 D2.2@26.162,86.273 ; D2.2 D2.2@26.493,86.323 ; USB1.2@30.838,86.323 USB1.2@30.945,86.43
  Top Layer w1: USB1.2@30.945,86.43 USB1.2
NetD4_2: D4.1 R13.1 | length 4.6
  Top Layer w1: R13.1 38.06,111.633 D4.1
NetD5_1: D5.1 R14.1 | length 2.7
  Top Layer w1: R14.1 D5.1
NetD6_1: D6.1 R15.1 | length 2.5
  Top Layer w1: R15.1 D6.1
NetD7_1: D7.1 R16.1 | length 2.5
  Top Layer w1: R16.1 D7.1
NetDZ1_1: DZ1.1 R12.2 | length 2.7
  Top Layer w1: DZ1.1 R12.2
NetDZ1_2: DZ1.2 U1.1 | length 37.2
  Top Layer w0.254: U1.1 13.843,69.85 15.748,71.755 17.907,71.755 23.622,77.47 46.179,77.47 DZ1.2
NetH1_2: H1.2 R10.1 R11.2 | length 7.8
  Top Layer w0.254: H1.2 46.482,119.38 47.117,118.745 R10.1 R11.2
NetH1_4: H1.4 R8.1 R9.2 | length 7.6
  Top Layer w0.254: H1.4 42.282,116.087 R8.1 R9.2
NetH1_7: H1.7 PE1.1
NetL1_1: L1.1 X1.1 | length 21.5
  Top Layer w2.5: X1.1@5.43,114.935 11.43,114.935 13.843,114.935 18.669,119.761 L1.1
NetLED1_6: LED1.6 R31.1 | length 2.5
  Top Layer w0.254: LED1.6 R31.1
NetLED1_8: LED1.8 R26.2 | length 2
  Top Layer w0.254: LED1.8 R26.2
NetLED1_9: LED1.9 R25.2 | length 2.5
  Top Layer w0.254: LED1.9 36.322,72.635 R25.2 ; R25.2@36.331,72.517 R25.2@36.331,72.898
NetLED1_12: LED1.12 R24.2 | length 2.7
  Top Layer w0.254: LED1.12 R24.2
NetLED2_6: LED2.6 R30.1 | length 2.2
  Top Layer w0.254: LED2.6 R30.1
NetLED2_8: LED2.8 R29.2 | length 3.7
  Top Layer w0.254: R29.2 LED2.8
NetLED2_9: LED2.9 R28.2 | length 3.7
  Top Layer w0.254: LED2.9 36.322,47.126 R28.2
NetLED2_12: LED2.12 R27.2 | length 2.2
  Top Layer w0.254: LED2.12 R27.2
NetQ1_1: Q1.1 R5.1 | length 3.7
  Top Layer w1: R5.1 64.524,73.922 64.524,76.049 64.836,76.361 Q1.1
NetQ1_3: Q1.3 U2.1 | length 12.4
  Top Layer w1: Q1.3 65.786,82.677 69.088,85.979 U2.1
NetQ2_3: Q2.3 Q3.1 R17.1 | length 10.7
  Top Layer w0.254: Q3.1 Q2.3 12.954,28.067 R17.1
NetQ3_3: Q3.3 R18.1 | length 4.5
  Top Layer w0.254: R18.1 4.826,36.957 5.512,36.271 Q3.3
NetQ4_3: Q4.3 Q5.1 R19.2 R23.1 | length 11.5
  Top Layer w0.5: R23.1 Q4.3 18.034,53.213 19.533,51.714 19.533,51.638 Q5.1 19.863,48.59 R19.2
NetQ5_3: Q5.3 R22.1 | length 4.2
  Top Layer w0.5: Q5.3 R22.1
NetR3_1: R3.1 R4.2 | length 3.2
  Top Layer w1.5: R4.2 R3.1
NetR6_1: R6.1 U1.4 | length 4.4
  Top Layer w1.5: R6.1 13.327,77.978 13.843,77.462 U1.4
NIN: B1.2 D3.2 H1.8 N1.1 | length 50.5
  Bottom Layer w1.5: N1.1 6.985,107.442 16.256,107.442 ; D3.2 20.574,105.41 18.542,107.442 16.256,107.442 ; H1.8 20.408,121.246 16.256,117.094 16.256,107.442
Q1: Q2.1 U5.40 | length 72.8
  Top Layer w0.254: Q2.1 15.799,33.528 48.387,33.528 64.643,49.784 64.643,61.023 62.908,62.758 U5.40
RXD: R11.1 U5.5 | length 52
  Top Layer w0.254: v1(49.53,111.379) R11.1 ; U5.5 57.011,71.489 v1(58.166,72.644)
  Bottom Layer w0.254: v1(49.53,111.379) 48.514,111.379 47.371,110.236 47.371,105.156 58.166,94.361 v1(58.166,72.644)
RXD0: J1.2 U5.19 | length 25.6
  Top Layer w0.254: J1.2 28.575,63.246 49.636,63.246 50.01,63.62 50.011,63.62 50.15,63.758 U5.19
TXD: R9.1 U5.6 | length 52
  Top Layer w0.254: v1(44.704,111.379) R9.1 ; v1(56.503,74.029) 56.503,71.616 56.511,71.608 U5.6
  Bottom Layer w0.254: v1(44.704,111.379) 45.72,111.379 46.863,110.236 46.863,104.946 57.658,94.151 57.658,75.946 56.515,74.803 v1@56.515,74.041
TXD0: J1.3 U5.20 | length 25.3
  Top Layer w0.254: J1.3 27.507,62.103 28.142,62.738 49.77,62.738 50.29,63.258 U5.20
V: D8.1 D9.2 H1.5 R7.1 R18.2 R20.2 | length 182.9
  Top Layer w1: D8.1 4.791,42.886 4.791,42.496 5.377,41.91 R20.2 v1@8.255,40.259 ; R18.2@4.917,40.005 v1(8.255,40.005) ; R20.2@8.255,42.291 8.281,42.317 8.281,45.313 D9.2 ; H1.5 38.1,126.765 38.1,129.843 38.686,130.429 55.372,130.429 61.214,124.587 61.214,118.491 59.698,116.975 58.936,116.975 R7.1
  Bottom Layer w1: v1(8.255,40.005) 8.253,40.007 8.253,43.662 v1(8.251,43.664) 3.834,43.664 1.524,45.974 1.524,118.999 3.556,121.031 10.668,121.031 12.192,122.555 12.192,128.397 14.478,130.683 36.83,130.683 37.867,129.646 37.867,126.961 H1.5
pads on no net: K1.1 K1.3 K2.1 K2.3 K3.1 K3.3 K4.1 K4.3 U5.4 U5.14 U5.18 U5.36 U5.45 U5.46 U5.47 USB1.5 USB1.7

## Polygon pours and split planes (outlines as drawn)
GND on Top Layer "GND_L01_P002" (solid, remove dead copper, pour order 2): 47.083,75.836 -2.64,75.836 -2.64,-3.269 69.132,-3.269 75.031,10.45 75.031,133.891 47.083,133.891
GND on Top Layer "GND_L01_P001" (solid, pour order 1): 40.005,132.715 40.005,125.095 52.578,125.095 52.578,132.715
GND on Bottom Layer "GND_L02_P000" (solid, remove dead copper, pour order 0): 46.99,75.549 -2.734,75.549 -2.734,-3.556 69.039,-3.556 74.938,10.163 74.938,133.604 46.99,133.604

## Keep-outs
Keep-Out Layer:
  circle w0.254: c4.953,33.007 r2
  circle w0.254: c4.953,99.949 r2
  circle w0.254: c67.995,33.007 r2
  circle w0.254: c67.995,99.949 r2
  lines w0.127: 0.127,10.127 0.127,122.806 10,122.806 ccw(c10,122.933) 10.127,122.933 10.127,132.873 62.735,132.873 62.735,122.969 ccw(c62.862,122.969) 62.862,122.842 72.862,122.842 ccw(c72.862,122.969) 72.873,122.843 72.873,10.163 62.898,10.163 ccw(c62.898,10.036) 62.771,10.036 62.771,0.127 10.127,0.127 10.127,10 ccw(c10,10) 10,10.127 0.127,10.127
  lines w0.254: 12.896,93.653 ccw(c13.596,93.653) 14.296,93.669 ; 12.9,93.668 12.9,104.596 ; 12.905,104.584 cw(c13.605,104.6) 14.305,104.6 ; 14.303,93.668 14.303,104.627

## Other copper
Top Layer:
  region net NetH1_7: 24.384,123.317 29.591,123.317 31.242,124.968 35.052,124.968 35.814,125.73 35.814,127.889 35.179,128.524 24.384,128.524
  region net NIN: 11.811,108.585 11.811,102.362 9.271,102.362 8.128,103.505 2.921,103.505 2.921,108.458 2.794,108.585
  region net NetD2_1: 25.527,85.471 25.654,85.344 29.464,85.344 29.464,81.28 30.226,80.518 32.004,80.518 32.639,81.153 32.639,86.995 32.131,87.503 25.64,87.503
  region net NetD2_1: 18.288,88.265 18.415,88.138 22.987,88.138 25.527,85.598 25.527,85.344 27.305,85.344 27.305,87.503 26.162,87.503 23.368,90.297 18.288,90.297
  region net NetC4_1: 22.225,82.804 26.797,82.804 27.305,83.312 27.305,84.201 26.797,84.709 22.225,84.709
  region net NetB1_4: 15.621,82.677 20.447,82.677 20.447,84.836 20.32,84.963 14.224,84.963 14.097,84.836
Bottom Layer:
  region net GND: 4.953,73.533 4.953,67.818 10.541,67.818 10.541,73.533

## Silkscreen, mask and mechanical layers (free items; w line width, h text height)
Top Overlay:
  text "YW-001 V2.0 20240930 /  POWER BY CAMERON" at 22.479,2.032 h1.52
Mechanical 1:
  lines w0.254: 10,132.933 10,122.933 0,122.933 0,10 10,10 10,0 62.898,0 ; 10,133 62.862,133 ; 62.862,132.969 62.862,122.969 72.862,122.969 ; 62.898,0.036 62.898,10.036 73,10.036 73,122.969